# Altium PCB v009 pcb.PCBDOC
Units mm, origin at the board's own origin, x right, y up, seen from the top; angles counter-clockwise.
Board outline 21.35 x 5.55 mm, 2 copper layers (Top Layer, Bottom Layer); 12 components, 30 nets, 84 pads, 36 vias.
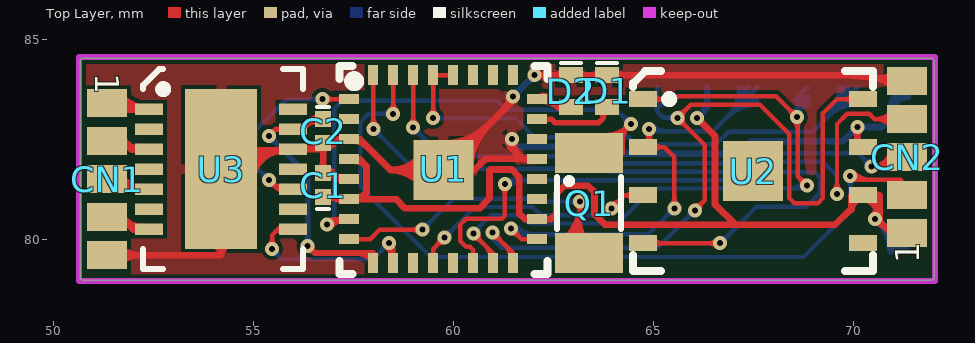
[diagram p0: Top Layer view]
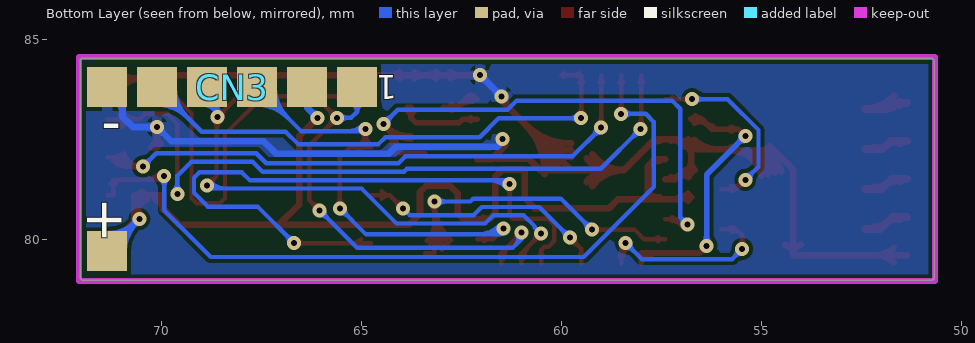
[diagram p1: Bottom Layer view, seen from below]

## Layer stack, top to bottom
Top Layer: signal copper 0.0356
Dielectric: core 0.32, FR-4, Dk 4.8
Bottom Layer: signal copper 0.0356

## Board outline
50.75,78.975 cw(c50.75,79.05) 50.675,79.05 50.675,84.45 cw(c50.75,84.45) 50.75,84.525 71.95,84.525 cw(c71.95,84.45) 72.025,84.45 72.025,79.05 cw(c71.95,79.05) 71.95,78.975

## Design rules (kind name [scope] priority, off if disabled: settings)
Clearance Clearance_Pad [All vs IsPad] p1: gap=0.1
Clearance Clearance_Via [(IsVia) vs (IsVia)] p2: gap=0.1
Clearance Polygon [InPoly vs IsPad] p3: gap=0.1
Clearance [All] p4: gap=0.1
DiffPairsRouting [All] p1: maxlimit=0.2 minlimit=0.2 mostfreqgap=0.2 maxuncoupledlength=0.2
FabricationTestPointUsage TestPointUsage [All] p1: valid=0 allowmultiple=FALSE
FabricationTestpoint Testpoint [All] p1: side=3 testpointundercomponent=TRUE minsize=1.016 maxsize=2.54 preferedsize=1.524 minholesize=0 maxholesize=1.016 preferedholesize=0.813 testpointgrid=0.025 allowsidetop=TRUE allowsidebottom=TRUE usegrid=TRUE gridtolerance=0
HoleSize [All] p1: absolutevalues=TRUE maxlimit=2.54 minlimit=0.15 maxpercent=80.000 minpercent=20.000
HoleToHoleClearance [All] p1: gap=0.1 allowstackedmicrovias=FALSE
MinimumAnnularRing [All] p1: minimumring=0.1
MinimumSolderMaskSliver [All] p1 off: minsoldermaskwidth=0.1
PolygonConnect [All] p1: connectstyle=Relief reliefconductorwidth=0.254 reliefentries=4 polygonreliefangle="90 Angle"
RoomDefinition "v009 schematics" [InComponentClass('v009 schematics')] p1: confinementstyle=ConfineIn formatcopy=TRUE lockcomponents=FALSE outline 48.05,77.9 73.1,77.9 73.1,85.85 48.05,85.85
RoutingCorners [All] p1: cornerstyle=Round minsetback=1 maxsetback=1
RoutingVias [All] p1: holewidth=0.15 width=0.35 viastyle="Through Hole" minholewidth=0.15 minwidth=0.35 maxholewidth=0.15 maxwidth=0.35
SMDNeckDown [All] p1: percent=100.000
SilkscreenOverComponentPads [All] p1 off: minsilkscreentomaskgap=0.254
SolderMaskExpansion SolderMaskExpansion_1 [(IsVia)] p1: expansion=-0.2
SolderMaskExpansion [All] p2: expansion=0.05
Width Width_3 [(InNet('PD5') OR InNet('PC0') OR InNet('PC1') OR InNet('NetGreen Led_1'))] p1: maxlimit=0.14 minlimit=0.14 preferedwidth=0.14
Width Width_2 [(InNet('HEAD 1') OR InNet('HEAD 2') OR InNet('HEAD 3') OR InNet('HCOMMON'))] p2: maxlimit=0.2 minlimit=0.2 preferedwidth=0.2
Width Width_1 [(InNet('GND') OR InNet('VCC'))] p3: maxlimit=0.17 minlimit=0.17 preferedwidth=0.17
Width [All] p4: maxlimit=0.11 minlimit=0.11 preferedwidth=0.11
20 further rules are at their usual default settings.

## Components (designator, comment, footprint, x,y, rotation, side; value= is the part's Value field where it differs from the comment)
+ "No component mounted" SU01LS 71.4,79.35 r0 bottom (schematic designator VCC)
C1 "100nF" CC0603(0201) 56.6,81.05 r90 top
C2 "100nF" CC0603(0201) 56.9,83 r270 top
CN1 "5pin smd" SU05LSR 51.35,83.4 r270 top
CN2 "5pin smd" SU05LSR 71.35,80.15 r90 top
CN3 "No component mounted" "SU06LST FULL" 64.5,83.2 r0 bottom
D1 "LED1" CC1005(0402) 64.1,84.2 r270 top
D2 "LED1" CC1005(0402) 63.2,84.2 r270 top
Q1 "32.768khz crystal 1.5 x 3.2mm" "QUARTZ SMD (SMALL)" 64.3,82.65 r270 top
U1 "ATMEL ATMEGA168V-10MU-ND" "32M1-A L 3" 57.15,84.35 r0 top
U2 "ATMEL AT45DB161D-MU-2.5" "8m1-a mlf 3" 64.5,84.2 r0 top
U3 "Asic 3V MLF14" "DELTA ASIC - 5" 56.25,84.25 r270 top

## Footprints (in the part's own frame and the unit in brackets; to place one, negate y for a bottom-side part, rotate by r counter-clockwise, add the part's x,y. Pads: shape width x height; smd on the part's side, far side on the other; paste and mask are expansions set on the pad)
"8m1-a mlf 3" [mm] "for at45db161d"
  rect 0.7x0.4 smd: 1(0.25,-0.7) 2(0.25,-1.9) 3(0.25,-3.1) 4(0.25,-4.3) 5(5.75,-4.3) 6(5.75,-3.1) 7(5.75,-1.9) 8(5.75,-0.7)
  rect 1.5x1.5 smd: ""(3,-2.5)
  silkscreen extent 0,-5 6,0, body extent 0,-5 6,0, height 1
"32M1-A L 3" [mm] "atmel uc modified"
  rect 0.5x0.25 smd: 1(0.25,-0.85) 2(0.25,-1.35) 3(0.25,-1.85) 4(0.25,-2.35) 5(0.25,-2.85) 6(0.25,-3.35) 7(0.25,-3.85) 8(0.25,-4.35) 17(4.95,-4.35) 18(4.95,-3.85) 19(4.95,-3.35) 20(4.95,-2.85) 21(4.95,-2.35) 22(4.95,-1.85) 23(4.95,-1.35) 24(4.95,-0.85)
  rect 0.25x0.5 smd: 9(0.85,-4.95) 10(1.35,-4.95) 11(1.85,-4.95) 12(2.35,-4.95) 13(2.85,-4.95) 14(3.35,-4.95) 15(3.85,-4.95) 16(4.35,-4.95) 25(4.35,-0.25) 26(3.85,-0.25) 27(3.35,-0.25) 28(2.85,-0.25) 29(2.35,-0.25) 30(1.85,-0.25) 31(1.35,-0.25) 32(0.85,-0.25)
  rect 1.5x1.5 smd: 33(2.607,-2.624)
  silkscreen extent 0.01,-5.22 5.21,-0.02, body extent 0.1,-5.1 5.1,-0.1, height 1
CC0603(0201) [mm]
  rect 0.4x0.4 smd: 1(0,-0.15) 2(0.6,-0.15)
  silkscreen extent -0.3,-0.3 -0.3,0, body extent 0,-0.3 0.6,0, height 1
CC1005(0402) [mm]
  rect 0.4x0.6 smd: 1(0.1,-0.25) 2(0.9,-0.25)
  silkscreen extent -0.2,-0.5 -0.2,0, body extent 0,-0.5 1,0, height 1
"DELTA ASIC - 5" [mm]
  rect 0.28x0.7 smd: 1(1,-3.85) 2(1.5,-3.85) 3(2,-3.85) 4(2.5,-3.85) 5(3,-3.85) 6(3.5,-3.85) 7(4,-3.85) 8(4,-0.25) 9(3.5,-0.25) 10(3,-0.25) 11(2.5,-0.25) 12(2,-0.25) 13(1.5,-0.25) 14(1,-0.25)
  rect 4x1.8 smd: 15(2.5,-2.05)
  silkscreen extent 0,-4 5,0, body extent 0,-4 5,0, height 0.7
"QUARTZ SMD (SMALL)" [mm] "CC7V-T1A"
  rect 1x1.7 smd: 1(0.5,-0.9) 2(3,-0.9)
  silkscreen extent 1.1,-1.7 2.4,-0.1, body extent 0.1,-1.65 3.3,-0.15, height 0.5
SU01LS [mm]
  rect 1x1 smd: 1(-0.05,-0.35)
SU05LSR [mm]
  rect 0.7x1 smd: 1(0,0) 2(0.95,0) 3(1.9,0) 4(2.85,0) 5(3.8,0)
"SU06LST FULL" [mm]
  rect 1x1 smd: 1(0.6,-0.6) 2(1.85,-0.6) 3(3.1,-0.6) 4(4.35,-0.6) 5(5.6,-0.6) 6(6.85,-0.6)

## Part data
+: library part "1pin smd"
C1 C2: library part Cap, "100nf Capacitor - Footprint CC0603 (0201)"
CN1 CN2: "No component mounted"
CN3: library part "6pin smd"
D1: library part LED3, "LED 0402 GREEN 465NM TRANSPARENT"
D2: library part LED3, "LED 0402 RED 465NM TRANSPARENT"
Q1: library part "2pin smd", "CRYSTAL 32.768KHZ 1.5 x 3.2mm"
U1: library part ATmega8L-8MC, "ATMEL ATMEGA168V-10MU"
U2: library part at45db041b, "ATMEL AT45DB321D-MU"
U3: library part "delta asic 3volt"

## Via types
v1: diameter 0.35, hole 0.15, Top Layer to Bottom Layer, 36 vias

## Nets (pads, with @x,y where several pads share a name; then routed paths per layer and width w, separated by ;. In a path a pad name is that pad's centre, name@x,y a point inside that pad or via, vN(x,y) a via of type N, cw(c..) or ccw(c..) an arc to the next point about the centre after c; other vN are vias at no path point)
ADC6: U1.19
ADC7: U1.22
GND: C1.2 C2.2 CN1.5 CN2.5 CN3.6 D1.1 D2.1 U1.3 U1.5 U1.21 U1.33 U2.7 U3.12 U3.15 | length 69.1
  Top Layer w0.17: CN1.5 54.2,79.6 ; CN1.5@51.687,79.413 cw(c52.14,78.96) 52.14,79.6 cw(c52.14,80.24) CN1.5@51.687,79.787 ; U3.15@53.998,79.86 cw(c53.931,79.6) 54.2,79.6 ; U3.15@54.402,79.86 ccw(c54.469,79.6) 54.2,79.6 ; U3.15@54.499,81.691 cw(c55.137,81.565) 55.137,82.215 ; U3.15@54.666,81.658 cw(c55.344,81.525) 55.344,82.215 ; U3.15@54.776,82.326 ccw(c55.044,82.594) U3.15@55.044,82.215 ; U3.15@54.833,81.625 cw(c55.551,81.484) 55.551,82.215 ; U3.15@55,81.592 cw(c55.757,81.443) U3.12@55.757,82.215 ; 55.574,82.215 ccw(c55.574,82.466) U3.12@55.751,82.289 ; U3.12@56.11,82.25 ccw(c56.11,83.04) C2.2@56.669,82.481 ; 56.52,82.25 ccw(c56.52,82.63) C2.2@56.789,82.361 ; C1.2@56.669,81.731 ccw(c56.472,81.928) 56.75,81.928 ccw(c57.028,81.928) C1.2@56.831,81.731 ; C2.2@56.669,82.319 cw(c56.472,82.122) 56.75,82.122 cw(c57.028,82.122) C2.2@56.831,82.319 ; C2.2@56.714,82.358 ccw(c56.847,82.515) 56.992,82.37 ; C1.2@56.719,81.695 cw(c56.833,81.528) 56.976,81.671 ; C1.2@56.741,81.704 cw(c56.798,81.368) 57.038,81.609 ; C1.2@56.815,81.555 cw(c56.951,81.356) 57.121,81.526 ; C2.2@56.824,82.488 ccw(c56.967,82.656) 57.123,82.5 ; C2.2@56.832,82.32 cw(c57.023,82.134) 57.023,82.4 ; C2.2@56.832,82.48 ccw(c57.023,82.666) 57.023,82.4 ; C1.2@56.838,81.576 cw(c56.998,81.441) 56.998,81.65 ; C1.2@56.838,81.724 ccw(c56.998,81.859) 56.998,81.65 ; 57.047,82.424 cw(c57.182,82.289) U1.3@57.259,82.463 ; 57.061,81.586 ccw(c57.201,81.726) U1.5@57.263,81.538 ; U1.5 57.148,81.5 56.998,81.65 ; U1.3@57.525,82.46 cw(c57.525,82.042) 57.82,82.338 ; U1.3@57.542,82.464 cw(c57.612,82.321) 57.725,82.433 ; U1.33@59.224,81.329 ccw(c58.432,80.739) 58.432,81.726 ; U1.33@59.224,82.123 cw(c58.432,82.713) 58.432,81.726 ; U1.33@59.36,81.43 ccw(c58.771,80.991) 58.771,81.726 ccw(c58.771,82.461) U1.33@59.36,82.022 ; U1.33@59.757,82.051 ccw(c59.757,82.836) 60.312,82.281 ccw(c60.867,81.726) U1.33@60.082,81.726 ; U1.33@59.757,82.221 ccw(c59.757,83.416) 60.602,82.571 ccw(c61.447,81.726) U1.33@60.252,81.726 ; U1.33@59.757,82.391 ccw(c59.757,83.996) 60.892,82.861 ccw(c62.027,81.726) U1.33@60.422,81.726 ; U1.33@60.415,81.629 cw(c60.527,81.612) 60.527,81.726 ; U1.33@60.415,81.823 ccw(c60.527,81.84) 60.527,81.726 ; 61.266,83.235 ccw(c60.936,83.566) v1@61.403,83.566 ; v1@61.395,82.532 ccw(c61.584,82.447) 61.438,82.301 ; v1(61.468,82.499) 61.468,82.271 61.727,82.012 ; v1(61.493,83.566) 61.493,83.462 U1.33 ; v1@61.55,82.463 ccw(c61.826,82.34) 61.613,82.126 ; v1(62.027,84.1) D2.1 63.398,84.1 D1.1 69.849,84.1 CN2.5 ; v1@62.091,84.036 cw(c62.245,83.883) 62.245,84.1 cw(c62.245,84.317) v1@62.091,84.164 ; D2.1@62.769,84.019 ccw(c62.572,83.822) 62.572,84.1 ccw(c62.572,84.378) D2.1@62.769,84.181 ; D2.1@63.131,84.019 cw(c63.328,83.822) 63.328,84.1 cw(c63.328,84.378) D2.1@63.131,84.181 ; D1.1@63.669,84.019 ccw(c63.472,83.822) 63.472,84.1 ccw(c63.472,84.378) D1.1@63.669,84.181 ; D1.1@64.031,84.019 cw(c64.228,83.822) 64.228,84.1 cw(c64.228,84.378) D1.1@64.031,84.181 ; U2.7@70.019,82.381 ccw(c69.813,82.587) 70.104,82.587 ; v1@70.04,82.74 cw(c69.887,82.587) 70.104,82.587 ; 70.104,82.568 ccw(c70.368,82.568) U2.7@70.181,82.381 ; v1(70.104,82.804) 70.104,82.3 U2.7 ; v1@70.168,82.74 ccw(c70.321,82.587) 70.104,82.587 ; 70.529,84.032 cw(c70.46,83.345) CN2.5@70.995,83.782 ; 70.601,84.025 ccw(c70.659,84.611) CN2.5@71.032,84.155 ; 54.2,79.6 U3.15 54.665,82.215 U3.12@55.757,82.215 ; U3.12@55.757,82.215 55.757,82.25 U3.12 56.6,82.25 C2.2 ; C2.2 57.023,82.4 ; C2.2 56.75,82.017 C1.2 56.998,81.65 ; 57.023,82.4 57.123,82.5 ; 57.123,82.5 U1.3 57.658,82.5 58.432,81.726 ; 58.432,81.726 U1.33 ; U1.33 60.527,81.726 ; 60.527,81.726 60.813,82.012 61.727,82.012 ; 61.468,82.282 cw(c61.685,82.282) 61.532,82.436 ccw(c61.685,82.282) 61.468,82.282 ; 61.468,82.282 ccw(c61.251,82.282) 61.404,82.436 cw(c61.251,82.282) 61.468,82.282 ; 61.727,82.012 U1.21 61.739,82 61.727,82.012
  Bottom Layer w0.17: v1(61.468,82.499) 61.468,82.437 61.595,82.31 64.132,82.31 64.306,82.136 67.13,82.136 67.441,82.448 69.748,82.448 v1(70.104,82.804) 70.71,82.804 70.964,83.058 70.964,83.414 CN3.6 ; v1(61.493,83.566) v1(62.027,84.1) ; v1@61.493,83.656 ccw(c61.493,83.873) 61.647,83.72 ccw(c61.801,83.566) v1@61.583,83.566 ; v1@61.547,82.456 ccw(c61.633,82.41) 61.564,82.341 ; v1@61.937,84.1 cw(c61.72,84.1) 61.874,83.946 cw(c62.027,83.793) v1@62.027,84.01 ; v1@70.014,82.804 cw(c69.797,82.804) 69.95,82.65 cw(c70.104,82.497) v1@70.104,82.714 ; v1@70.168,82.74 cw(c70.321,82.587) 70.321,82.804 cw(c70.321,83.021) v1@70.168,82.868 ; 70.964,83.141 cw(c71.378,83.141) CN3.6@71.36,83.555 ; CN3.6@70.964,83.318 cw(c71.371,83.318) CN3.6@71.353,83.725
HCOMMON: CN1.1 U3.1 | length 3.1
  Top Layer w0.2: CN1.1 51.791,83.4 51.941,83.25 ; CN1.1@51.523,83.356 cw(c51.668,83.074) 51.892,83.298 ; CN1.1@51.537,83.434 ccw(c51.95,83.806) 51.95,83.25 ; CN1.1@51.686,83.568 ccw(c52.4,84.212) U3.1 51.941,83.25 ; CN1.1@51.749,83.424 ccw(c51.941,83.443) 51.941,83.25
"HEAD 1": CN1.2 U3.3 | length 1.8
  Top Layer w0.2: CN1.2 51.765,82.45 51.965,82.25 U3.3 ; CN1.2@51.519,82.404 cw(c51.647,82.092) 51.885,82.33 ; 51.878,82.338 ccw(c52.062,82.522) U3.3@52.173,82.286
"HEAD 2": CN1.3 U3.5 | length 1.9
  Top Layer w0.2: CN1.3 51.74,81.5 51.99,81.25 U3.5 ; CN1.3@51.515,81.452 cw(c51.622,81.11) 51.876,81.364 ; CN1.3@51.84,81.4 ccw(c52.119,81.679) U3.5@52.183,81.289
"HEAD 3": CN1.4 U3.7 | length 2
  Top Layer w0.2: CN1.4 51.714,80.55 52.014,80.25 U3.7 ; CN1.4@51.511,80.501 cw(c51.596,80.129) 51.865,80.399 ; CN1.4@51.822,80.442 ccw(c52.19,80.81) U3.7@52.19,80.29
PB0: U1.12 U2.3 | length 8.4
  Top Layer w0.11: U1.12@59.451,79.574 ccw(c59.331,79.694) 59.5,79.694 ccw(c59.669,79.694) U1.12@59.55,79.574 ; U1.12 59.5,79.756 v1(59.779,80.035) ; v1@59.659,80.035 cw(c59.37,80.035) 59.575,79.831 cw(c59.779,79.626) v1@59.779,79.915 ; v1(63.957,80.772) 64.285,81.1 ; v1@63.957,80.892 ccw(c63.957,81.182) 64.162,80.977 ccw(c64.367,80.772) v1@64.077,80.772 ; U2.3@64.49,81.006 ccw(c64.285,80.831) 64.285,81.1 ; U2.3@64.49,81.194 cw(c64.285,81.369) 64.285,81.1 ; U2.3 64.285,81.1
  Bottom Layer w0.11: v1(59.779,80.035) 60.548,80.804 61.986,80.804 62.187,80.602 63.788,80.602 v1(63.957,80.772) ; v1@59.779,80.155 ccw(c59.779,80.445) 59.984,80.24 ccw(c60.189,80.035) v1@59.899,80.035
PB1: U1.13
PB2: U1.14 U2.4 | length 19.5
  Top Layer w0.11: U1.14@60.451,79.574 ccw(c60.331,79.694) 60.5,79.694 ccw(c60.669,79.694) U1.14@60.55,79.574 ; U1.14 60.5,79.731 60.424,79.807 60.325,79.807 60.173,79.959 60.173,80.357 60.325,80.509 61.219,80.509 61.29,80.581 v1(61.29,81.382) ; v1@61.205,81.297 cw(c61,81.092) 61.29,81.092 cw(c61.58,81.092) v1@61.375,81.297 ; U2.4 v1(66.676,79.9) ; U2.4@65.002,79.797 cw(c65.25,79.55) 65.25,79.9 cw(c65.25,80.25) U2.4@65.002,80.003 ; v1@66.591,79.815 ccw(c66.386,79.61) 66.386,79.9 ccw(c66.386,80.19) v1@66.591,79.985
  Bottom Layer w0.11: v1(61.29,81.382) 61.385,81.476 67.79,81.476 67.982,81.669 69.045,81.669 69.18,81.534 69.18,81.159 68.834,80.814 67.589,80.814 v1(66.676,79.9) ; v1@61.297,81.375 cw(c61.543,81.129) 61.543,81.476 ; v1@61.375,81.297 cw(c61.809,80.863) 61.809,81.476 ; v1@66.676,80.02 ccw(c66.676,80.31) 66.881,80.105 ccw(c67.086,79.9) v1@66.796,79.9
PB3: CN3.4 U1.15 U2.1 | length 22.3
  Top Layer w0.11: v1@60.503,80.017 cw(c60.503,79.727) 60.708,79.932 cw(c60.913,80.137) v1@60.623,80.137 ; v1(60.503,80.137) 61,79.64 U1.15 ; 60.799,79.841 cw(c60.484,79.525) U1.15@60.93,79.525 ; 60.987,79.653 cw(c60.859,79.525) U1.15@61.04,79.525 ; U2.1 65.551,83.5 65.623,83.573 68.072,83.573 v1(68.596,83.049) 68.617,83.028 68.617,81.572 v1(68.85,81.339) ; U2.1@65.002,83.397 cw(c65.25,83.15) 65.25,83.5 cw(c65.25,83.85) U2.1@65.002,83.603 ; v1@68.476,83.049 ccw(c68.186,83.049) 68.391,83.253 ccw(c68.596,83.458) v1@68.596,83.169 ; v1@68.511,82.964 cw(c68.256,82.708) 68.617,82.708 ; 68.617,82.809 cw(c68.835,82.809) v1@68.681,82.964 ; v1@68.73,81.339 ccw(c68.44,81.339) 68.645,81.543 ccw(c68.85,81.748) v1@68.85,81.459
  Bottom Layer w0.11: v1(60.503,80.137) 60.655,80.29 60.655,80.315 60.935,80.594 61.7,80.594 61.901,80.392 64.115,80.392 64.989,81.266 68.778,81.266 v1(68.85,81.339) ; 68.386,81.266 ccw(c68.386,81.803) v1@68.765,81.423 ; v1@68.511,83.133 ccw(c68.306,83.338) CN3.4@68.596,83.338 ; CN3.4@68.535,83.485 cw(c68.389,83.339) CN3.4@68.596,83.339 ; v1@68.596,83.007 cw(c68.95,83.007) CN3.4@68.906,83.358 ; v1(68.596,83.049) 68.596,83.504 68.575,83.525 CN3.4 ; v1@68.596,83.132 cw(c68.935,83.132) CN3.4@68.892,83.468 ; 68.596,83.256 cw(c68.919,83.256) CN3.4@68.878,83.577 ; 68.651,81.266 ccw(c68.651,81.537) v1@68.843,81.346 ; v1@68.681,83.133 cw(c68.886,83.338) CN3.4@68.596,83.338
PB4: CN3.1 U1.16 U2.8 | length 24.4
  Top Layer w0.11: v1@60.985,80.042 cw(c60.985,79.753) 61.19,79.958 cw(c61.395,80.162) v1@61.105,80.162 ; v1(60.985,80.162) 61.5,79.648 U1.16 ; 61.294,79.854 cw(c60.965,79.525) U1.16@61.43,79.525 ; 61.481,79.666 cw(c61.34,79.525) U1.16@61.54,79.525 ; v1@65.608,82.913 cw(c65.608,82.623) 65.813,82.828 cw(c66.018,83.033) 65.728,83.033 cw(c66.018,83.033) 65.813,83.237 cw(c65.608,83.442) v1@65.608,83.153 ; v1(66.04,80.721) 66.294,80.975 66.294,82.347 v1(65.608,83.033) 65.938,83.363 67.669,83.363 68.405,82.626 68.405,81.026 68.532,80.899 69.113,80.899 69.24,81.026 69.24,83.144 69.596,83.5 U2.8 ; v1@66.04,80.841 ccw(c66.04,81.131) 66.245,80.926 ccw(c66.45,80.721) v1@66.16,80.721 ; U2.8@69.997,83.397 ccw(c69.75,83.15) 69.75,83.5 ccw(c69.75,83.85) U2.8@69.997,83.603
  Bottom Layer w0.11: v1(60.985,80.162) 60.985,80.01 61.214,79.781 65.1,79.781 v1(66.04,80.721) ; v1@60.994,80.158 ccw(c61.146,80.086) 61.027,79.968 ; v1@61.094,80.111 ccw(c61.296,80.016) 61.138,79.858 ; CN3.1@64.961,83.377 cw(c64.898,83.185) 65.1,83.185 ; CN3.1 65.1,83.185 ; CN3.1@65.239,83.377 ccw(c65.302,83.185) 65.1,83.185 ; v1@65.523,82.948 ccw(c65.318,82.743) 65.318,83.033 ccw(c65.318,83.322) v1@65.523,83.117 ; v1(65.608,83.033) 65.252,83.033 65.1,83.185 ; v1@65.92,80.721 cw(c65.63,80.721) 65.835,80.516 cw(c66.04,80.311) v1@66.04,80.601
PB5: CN3.3 U1.17 U2.2 | length 19.7
  Top Layer w0.11: v1@61.446,80.144 cw(c61.446,79.854) 61.651,80.059 cw(c61.855,80.264) v1@61.566,80.264 ; v1(61.446,80.264) 61.71,80 U1.17 ; U1.17@61.926,79.95 ccw(c61.806,79.831) 61.806,80 ccw(c61.806,80.169) U1.17@61.926,80.049 ; U2.2@64.797,82.403 ccw(c64.557,82.643) v1@64.897,82.643 ; v1@64.812,82.668 cw(c64.607,82.463) 64.897,82.463 cw(c65.187,82.463) v1@64.982,82.668 ; v1@64.897,82.657 ccw(c65.257,82.657) 65.002,82.403 ccw(c65.25,82.65) 65.25,82.3 ccw(c65.25,81.95) U2.2@65.002,82.197 ; v1(64.897,82.753) U2.2@64.897,82.3 ; v1@65.447,80.857 ccw(c65.242,81.062) 65.532,81.062 ccw(c65.822,81.062) v1@65.617,80.857 ; v1(65.532,80.772) 65.532,82.046 65.278,82.3 U2.2@64.897,82.3 ; U2.2@64.897,82.3 U2.2 U2.2@64.897,82.3
  Bottom Layer w0.11: v1@61.375,80.193 ccw(c61.556,80.375) 61.556,80.118 ; v1(61.446,80.264) 61.591,80.118 64.878,80.118 v1(65.532,80.772) ; v1@61.453,80.271 ccw(c61.822,80.64) 61.822,80.118 ; v1@61.531,80.349 ccw(c62.087,80.906) 62.087,80.118 ; v1(64.897,82.753) 64.973,82.753 65.024,82.703 66.503,82.703 CN3.3 ; v1@64.982,82.838 ccw(c65.309,83.165) 65.309,82.703 ; v1@65.412,80.772 cw(c65.122,80.772) 65.327,80.567 cw(c65.532,80.362) v1@65.532,80.652 ; CN3.3@67.155,83.8 cw(c66.081,83.8) 66.84,83.04 cw(c67.6,82.281) CN3.3@67.6,83.355 ; CN3.3@67.265,83.8 cw(c66.456,83.8) 67.028,83.228 cw(c67.6,82.656) CN3.3@67.6,83.465 ; CN3.3@67.375,83.8 cw(c66.832,83.8) 67.216,83.416 cw(c67.6,83.032) CN3.3@67.6,83.575
PC0: D1.2 U1.23 | length 2.7
  Top Layer w0.14: U1.23 62.459,83 62.553,82.906 63.627,82.906 63.754,83.033 ; U1.23@62.264,82.961 cw(c62.358,82.867) 62.358,83 cw(c62.358,83.133) U1.23@62.264,83.039 ; D1.2@63.672,83.196 cw(c63.55,83.033) 63.754,83.033 ; D1.2@63.833,83.2 ccw(c63.97,83.033) 63.754,83.033 ; D1.2 63.754,83.3 63.754,83.033
PC1: D2.2 U1.24 | length 2.6
  Top Layer w0.14: U1.24 62.408,83.5 62.608,83.3 ; U1.24@62.188,83.576 cw(c62.254,83.441) 62.36,83.548 ; U1.24@62.225,83.445 cw(c62.225,82.871) 62.631,83.277 ; U1.24@62.225,83.585 cw(c62.225,83.349) 62.392,83.516 ; U1.24@62.249,83.451 cw(c62.345,83.254) 62.499,83.409 ; U1.24@62.264,83.461 cw(c62.358,83.367) 62.358,83.5 cw(c62.358,83.633) U1.24@62.264,83.539 ; D2.2@62.742,83.228 ccw(c62.608,83.139) 62.608,83.3 ; D2.2@62.742,83.372 cw(c62.608,83.461) 62.608,83.3 ; D2.2 62.608,83.3
PC2: U1.25
PC3: U1.26
PC4: U1.27
PD2: CN2.4 U1.32 | length 21.5
  Top Layer w0.11: v1@57.929,82.838 ccw(c57.757,83.01) 58,83.01 ; U1.32@57.95,83.926 cw(c57.831,83.806) 58,83.806 cw(c58.169,83.806) U1.32@58.049,83.926 ; 58,83.076 ccw(c58.336,83.076) v1@58.098,82.838 ; U1.32 58,82.767 v1(58.014,82.753) ; v1@69.511,81.212 ccw(c69.306,81.417) 69.596,81.417 ccw(c69.886,81.417) v1@69.681,81.212 ; v1(69.596,81.128) 69.596,82.88 69.85,83.134 70.402,83.134 70.536,83 ; CN2.4@70.981,82.802 ccw(c70.536,82.4) 70.536,83 ; CN2.4@70.981,83.198 cw(c70.536,83.6) 70.536,83 ; CN2.4@71.063,82.876 ccw(c70.783,82.624) 70.783,83 ccw(c70.783,83.376) CN2.4@71.063,83.124 ; CN2.4 70.536,83
  Bottom Layer w0.11: v1@58.014,82.633 cw(c58.014,82.343) 58.218,82.548 cw(c58.423,82.753) v1@58.134,82.753 ; v1(58.014,82.753) 59.008,81.759 63.855,81.759 63.928,81.686 67.464,81.686 67.715,81.938 69.24,81.938 69.596,81.582 v1(69.596,81.128) ; v1@69.511,81.212 ccw(c69.306,81.417) 69.596,81.417 ccw(c69.886,81.417) v1@69.681,81.212
PD3: U1.1 U3.10 | length 7.5
  Top Layer w0.11: v1@55.397,81.363 cw(c55.397,81.073) 55.602,81.278 cw(c55.807,81.483) v1@55.517,81.483 ; v1(55.397,81.483) 55.631,81.25 ; v1@55.477,81.404 ccw(c55.681,81.608) U3.10@55.765,81.331 ; 55.607,81.274 ccw(c55.742,81.409) U3.10@55.797,81.226 ; U3.10@55.719,81.203 ccw(c55.631,81.143) 55.631,81.25 ; U3.10@55.719,81.297 cw(c55.631,81.357) 55.631,81.25 ; U3.10 55.631,81.25 ; v1(56.728,83.5) U1.1 ; v1@56.813,83.415 cw(c57.018,83.21) 57.018,83.5 cw(c57.018,83.79) v1@56.813,83.585 ; U1.1@57.225,83.451 ccw(c57.106,83.331) 57.106,83.5 ccw(c57.106,83.669) U1.1@57.225,83.55
  Bottom Layer w0.11: v1@55.277,81.483 ccw(c54.988,81.483) 55.193,81.688 ccw(c55.397,81.893) v1@55.397,81.603 ; v1(55.397,81.483) 55.067,81.813 55.067,82.728 55.839,83.5 v1(56.728,83.5) ; v1@56.644,83.415 ccw(c56.439,83.21) 56.439,83.5 ccw(c56.439,83.79) v1@56.644,83.585
PD4: U1.2
PD5: C2.1 U1.9 U3.13 | length 10.6
  Top Layer w0.14: v1(55.397,82.575) 55.572,82.75 U3.13 56.236,82.75 56.486,83 ; U3.13@55.74,82.701 ccw(c55.621,82.581) 55.621,82.75 ccw(c55.621,82.919) U3.13@55.74,82.799 ; U3.13@56.21,82.82 ccw(c56.21,83.051) 56.373,82.888 ; U3.13@56.331,82.845 cw(c56.73,82.446) C2.1@56.75,83.01 ; 56.354,82.868 cw(c56.53,82.692) C2.1@56.674,82.894 ; v1@56.363,79.727 cw(c56.365,79.479) 56.54,79.654 ; v1(56.363,79.832) 56.54,79.654 ; v1@56.468,79.832 ccw(c56.716,79.83) 56.54,79.654 ; 56.47,82.985 cw(c56.627,82.828) C2.1@56.756,83.008 ; C2.1@56.647,82.921 ccw(c56.486,82.796) 56.486,83 ; C2.1@56.647,83.079 cw(c56.486,83.204) 56.486,83 ; C2.1 56.486,83 ; 57.555,79.654 cw(c57.555,79.08) U1.9@57.961,79.486 ; 57.893,79.654 cw(c57.893,79.418) U1.9@58.06,79.585 ; U1.9@57.962,79.565 ccw(c57.875,79.654) 58,79.654 ; U1.9 58,79.654 ; U1.9@58.038,79.565 cw(c58.125,79.654) 58,79.654 ; 56.54,79.654 58,79.654
  Bottom Layer w0.14: v1@55.397,82.47 cw(c55.397,82.217) 55.577,82.396 cw(c55.756,82.575) v1@55.502,82.575 ; v1(55.397,82.575) 56.363,81.61 v1(56.363,79.832) ; v1@56.288,79.906 ccw(c56.109,80.086) 56.363,80.086 ccw(c56.616,80.086) v1@56.437,79.906
PD6: U1.10 U3.8 | length 8
  Top Layer w0.11: v1@55.389,79.841 ccw(c55.184,80.046) 55.474,80.046 ccw(c55.763,80.046) v1@55.558,79.841 ; v1(55.474,79.756) 55.474,80.098 55.626,80.25 ; 55.544,80.168 cw(c55.65,80.062) U3.8@55.739,80.182 ; 55.565,80.189 cw(c55.774,79.98) U3.8@55.791,80.275 ; 55.634,80.258 cw(c55.726,80.165) U3.8@55.805,80.27 ; U3.8@55.721,80.201 ccw(c55.626,80.134) 55.626,80.25 ; U3.8@55.721,80.299 cw(c55.626,80.366) 55.626,80.25 ; U3.8 55.626,80.25 ; v1@58.313,79.821 cw(c57.909,79.389) U1.10@58.5,79.389 ; v1@58.388,79.901 cw(c58.146,79.643) U1.10@58.5,79.643 ; v1(58.395,79.908) 58.5,79.803 U1.10 ; U1.10@58.451,79.574 ccw(c58.331,79.694) 58.5,79.694 ccw(c58.669,79.694) U1.10@58.55,79.574
  Bottom Layer w0.11: v1@55.474,79.636 cw(c55.474,79.346) 55.678,79.551 cw(c55.883,79.756) v1@55.594,79.756 ; v1(55.474,79.756) 55.727,79.502 57.988,79.502 v1(58.395,79.908) ; v1@58.275,79.908 cw(c57.985,79.908) 58.19,79.704 cw(c58.395,79.499) v1@58.395,79.788
PD7: U1.11
RST: CN3.5 U1.28 U1.29 | length 18.6
  Top Layer w0.11: v1@59.415,83.111 ccw(c59.21,83.316) 59.5,83.316 ccw(c59.79,83.316) v1@59.585,83.111 ; U1.29@59.451,83.926 cw(c59.331,83.806) 59.5,83.806 cw(c59.669,83.806) U1.29@59.55,83.926 ; v1(59.5,83.026) U1.29 U1.28 ; U1.29@59.55,84.051 cw(c59.669,83.931) 59.669,84.1 cw(c59.669,84.269) U1.29@59.55,84.15 ; U1.28@59.95,84.051 ccw(c59.831,83.931) 59.831,84.1 ccw(c59.831,84.269) U1.28@59.95,84.15
  Bottom Layer w0.11: v1(59.5,83.026) 61.558,83.026 62.033,82.55 64.394,82.55 64.568,82.376 66.579,82.376 66.89,82.688 68.988,82.688 CN3.5 ; v1@59.585,82.941 cw(c59.79,82.736) 59.79,83.026 cw(c59.79,83.316) v1@59.585,83.111 ; CN3.5@69.655,83.8 cw(c68.581,83.8) 69.34,83.04 cw(c70.1,82.281) CN3.5@70.1,83.355 ; CN3.5@69.765,83.8 cw(c68.956,83.8) 69.528,83.228 cw(c70.1,82.656) CN3.5@70.1,83.465 ; CN3.5@69.875,83.8 cw(c69.332,83.8) 69.716,83.416 cw(c70.1,83.032) CN3.5@70.1,83.575
RX: CN2.3 U1.30 | length 18.6
  Top Layer w0.11: v1@58.915,82.871 ccw(c58.71,83.076) 59,83.076 ccw(c59.29,83.076) v1@59.085,82.871 ; U1.30@58.95,83.926 cw(c58.831,83.806) 59,83.806 cw(c59.169,83.806) U1.30@59.049,83.926 ; v1(59,82.786) U1.30 ; v1@70.544,81.729 cw(c70.749,81.524) 70.749,81.813 cw(c70.749,82.103) v1@70.544,81.898 ; v1@70.613,81.813 ccw(c70.613,82.248) CN2.3@71.025,82.109 ; 70.766,81.813 ccw(c70.766,82.196) CN2.3@71.129,82.074 ; CN2.3@70.919,81.813 ccw(c70.919,82.145) CN2.3@71.233,82.039 ; CN2.3@70.92,82.144 cw(c70.46,82.3) v1(70.46,81.813) 70.917,81.813 70.917,82.05 CN2.3
  Bottom Layer w0.11: v1@59,82.666 cw(c59,82.376) 59.205,82.581 cw(c59.41,82.786) v1@59.12,82.786 ; v1(59,82.786) 59.716,82.07 63.892,82.07 64.066,81.896 67.37,81.896 67.621,82.148 70.125,82.148 v1(70.46,81.813) ; v1@70.34,81.813 ccw(c70.05,81.813) 70.255,82.018 ccw(c70.46,82.223) v1@70.46,81.933
TOSC1: Q1.1 U1.7 | length 18.8
  Top Layer w0.11: v1(56.845,80.366) 56.98,80.5 U1.7 ccw(c57.4,79.888) v1@56.936,80.287 ; v1@56.853,80.359 cw(c57.16,80.094) U1.7@57.16,80.5 ; U1.7@57.225,80.45 ccw(c57.106,80.331) 57.106,80.5 ccw(c57.106,80.669) U1.7@57.225,80.549 ; Q1.1 64.237,82.15 64.237,82.677 ; Q1.1@63.75,82.485 ccw(c63.751,83.194) 64.252,82.693 ; Q1.1@63.75,82.595 ccw(c63.751,83.569) v1(64.44,82.88) ; Q1.1@63.868,82.579 ccw(c63.968,82.946) 64.237,82.677 ; Q1.1@64.083,82.182 cw(c64.744,82.246) 64.275,82.715 ; Q1.1@64.163,82.316 cw(c64.473,82.441) 64.237,82.677 ; Q1.1@64.193,82.193 cw(c65.045,82.275) v1(64.44,82.88) ; v1@64.32,82.88 cw(c64.036,82.878) 64.237,82.677 ; v1@64.439,82.76 ccw(c64.437,82.476) 64.237,82.677 ; 64.237,82.677 v1(64.44,82.88)
  Bottom Layer w0.11: v1(56.845,80.366) 57.023,80.543 ; v1@56.858,80.485 ccw(c56.879,80.687) 57.023,80.543 ; v1@56.965,80.378 cw(c57.167,80.4) 57.023,80.543 ; v1@64.32,82.88 ccw(c64.03,82.88) 64.235,83.085 ccw(c64.44,83.29) v1@64.44,83 ; v1(64.44,82.88) 64.084,83.236 61.341,83.236 61.113,83.464 57.226,83.464 57.023,83.261 57.023,80.543
TOSC2: Q1.2 U1.8 | length 13.8
  Top Layer w0.11: U1.8 57.927,80 58.166,80.239 v1(59.233,80.239) ; U1.8@57.574,79.95 cw(c57.694,79.831) 57.694,80 cw(c57.694,80.169) U1.8@57.574,80.049 ; v1@59.148,80.154 ccw(c58.943,79.949) 58.943,80.239 ccw(c58.943,80.528) v1@59.148,80.323 ; Q1.2@62.748,79.977 ccw(c61.855,80.942) v1(63.17,80.942) 63.17,79.65 Q1.2 ; Q1.2@62.823,79.896 ccw(c62.088,80.69) 63.17,80.69 ; Q1.2@62.897,79.815 ccw(c62.321,80.439) 63.17,80.439 ; Q1.2@62.972,79.734 ccw(c62.553,80.187) 63.17,80.187 ; v1@63.085,80.857 cw(c62.88,80.652) 63.17,80.652 cw(c63.46,80.652) v1@63.255,80.857 ; 63.17,80.17 ccw(c63.57,80.17) Q1.2@63.287,79.887 ; 63.17,80.435 ccw(c63.835,80.435) Q1.2@63.365,79.965
  Bottom Layer w0.11: v1(59.233,80.239) 60.008,81.014 62.196,81.014 62.268,80.942 v1(63.17,80.942) ; v1@59.233,80.359 ccw(c59.233,80.648) 59.438,80.443 ccw(c59.643,80.239) v1@59.353,80.239 ; v1@63.085,80.857 ccw(c62.88,80.652) 62.88,80.942 ccw(c62.88,81.231) v1@63.085,81.027
TX: CN2.2 U1.31 | length 22.3
  Top Layer w0.11: v1@58.415,83.219 ccw(c58.21,83.424) 58.5,83.424 ccw(c58.79,83.424) v1@58.585,83.219 ; U1.31@58.451,83.926 cw(c58.331,83.806) 58.5,83.806 cw(c58.669,83.806) U1.31@58.55,83.926 ; v1(58.5,83.134) U1.31 ; v1(69.926,81.585) 70.028,81.483 71.196,81.483 ; v1@69.933,81.592 ccw(c70.196,81.854) 70.196,81.483 ; v1@70.011,81.67 ccw(c70.461,82.12) 70.461,81.483 ; CN2.2@71.121,81.384 ccw(c71.094,81.483) 71.196,81.483 ; CN2.2@71.272,81.386 cw(c71.296,81.483) 71.196,81.483 ; CN2.2 71.196,81.1 71.196,81.483
  Bottom Layer w0.11: v1@58.415,83.049 ccw(c58.21,82.844) 58.21,83.134 ccw(c58.21,83.424) v1@58.415,83.219 ; v1(58.5,83.134) 57.887,83.134 57.683,82.931 57.683,81.305 59.436,79.553 68.758,79.553 69.926,80.721 v1(69.926,81.585) ; v1@69.841,81.5 cw(c69.636,81.295) 69.926,81.295 cw(c70.216,81.295) v1@70.011,81.5
VCC: +.1 C1.1 CN2.1 CN3.2 U1.4 U1.6 U1.18 U2.6 | length 33.5
  Top Layer w0.17: C1.1 57.048,81.05 57.098,81 U1.6 57.683,81 ; C1.1@56.831,80.969 cw(c57.028,80.772) 57.028,81.05 cw(c57.028,81.328) C1.1@56.831,81.131 ; U1.4 57.658,82 57.836,81.822 57.836,81.153 ; U1.4@57.525,81.96 cw(c57.525,81.542) 57.82,81.838 ; U1.6@57.528,81.04 ccw(c57.56,81.429) 57.836,81.153 ; U1.4@57.542,81.964 cw(c57.612,81.821) 57.725,81.933 ; 61.74,80.555 ccw(c61.86,80.675) U1.18@61.953,80.533 ; v1@66.091,82.943 cw(c66.091,82.725) 66.244,82.879 cw(c66.398,83.033) v1@66.181,83.033 ; v1(66.091,83.033) 66.548,82.575 66.548,80.869 67.056,80.361 ; 69.956,80.735 cw(c70.228,80.735) U2.6@70.138,80.991 ; U2.6@70.348,80.997 cw(c70.088,80.484) v1@70.663,80.484 ; U2.6@70.425,81.149 cw(c70.228,80.761) 70.663,80.761 ; v1@70.481,80.569 ccw(c70.044,81.006) 70.663,81.006 ; U2.6@70.484,81.022 cw(c70.663,80.857) 70.663,81.1 ; U2.6@70.484,81.178 ccw(c70.663,81.343) 70.663,81.1 ; v1@70.545,80.415 cw(c70.545,80.077) 70.784,80.316 ; v1(70.545,80.505) 70.545,80.543 v1@70.663,80.543 ; CN2.1 70.95,80.15 70.663,80.437 v1@70.663,80.543 ; 57.683,81 58.573,81 58.801,80.772 60.655,80.772 60.909,81.026 60.909,81.721 60.93,81.742 61.468,81.742 61.65,81.559 61.65,80.645 61.795,80.5 U1.18 62.441,80.5 62.586,80.645 62.586,81.138 62.783,81.335 63.373,81.335 63.53,81.178 63.53,80.629 63.797,80.361 67.056,80.361 ; 57.683,81 57.836,81.153 ; 67.056,80.361 69.553,80.361 69.956,80.764 69.956,81.1 U2.6 70.663,81.1 ; v1@70.663,80.543 70.663,81.1
  Bottom Layer w0.17: v1(66.091,83.033) 66.35,83.292 CN3.2 ; v1@66.091,83.123 ccw(c66.091,83.34) 66.244,83.186 ccw(c66.398,83.033) v1@66.181,83.033 ; v1@70.545,80.415 cw(c70.545,80.198) 70.699,80.351 cw(c70.852,80.505) v1@70.635,80.505 ; v1(70.545,80.505) +.1 ; +.1@70.935,79.7 ccw(c69.933,79.7) 70.642,80.408 ccw(c71.35,81.117) +.1@71.35,80.115 ; +.1@71.105,79.7 ccw(c70.514,79.7) 70.932,80.118 ccw(c71.35,80.537) +.1@71.35,79.945
pads on no net: U1.20 U2. U2.5 U3.2 U3.4 U3.6 U3.9 U3.11 U3.14

## Polygon pours and split planes (outlines as drawn)
GND on Top Layer "Top Layer-No Net" (solid, remove dead copper): 50.65,84.55 72.05,84.55 72.05,78.95 50.65,78.95
GND on Bottom Layer "Top Layer-No Net" (solid, remove dead copper): 50.673,84.5 72.073,84.5 72.073,78.9 50.673,78.9

## Keep-outs
Keep-Out Layer:
  lines w0.15: 50.65,78.95 72.05,78.95 72.05,84.55 50.65,84.55 50.65,78.95

## Silkscreen, mask and mechanical layers (free items; w line width, h text height)
Bottom Overlay:
  text "-" at 71,82.45 h1

## Dimensions
50.65,78.95 to 50.65,84.55 on Mechanical 1
50.65,78.95 to 72.05,78.95 on Mechanical 1

## Text inside footprints (layer, text, board x,y; h text height)
CN1: Top Overlay "1" at 51.05,84.15 h0.6 r270
CN2: Top Overlay "1" at 71.65,79.4 h0.6 r90
CN3: Bottom Overlay "1" at 64.1,84.1 h0.6 r180